# Altium PCB PCB.pcbdoc
Units mil, origin at the board's own origin, x right, y up, seen from the top; angles counter-clockwise.
Board outline 4358.27 x 3713.31 mil, 2 copper layers (Top Layer, Bottom Layer); 36 components, 36 nets, 179 pads, 88 vias.
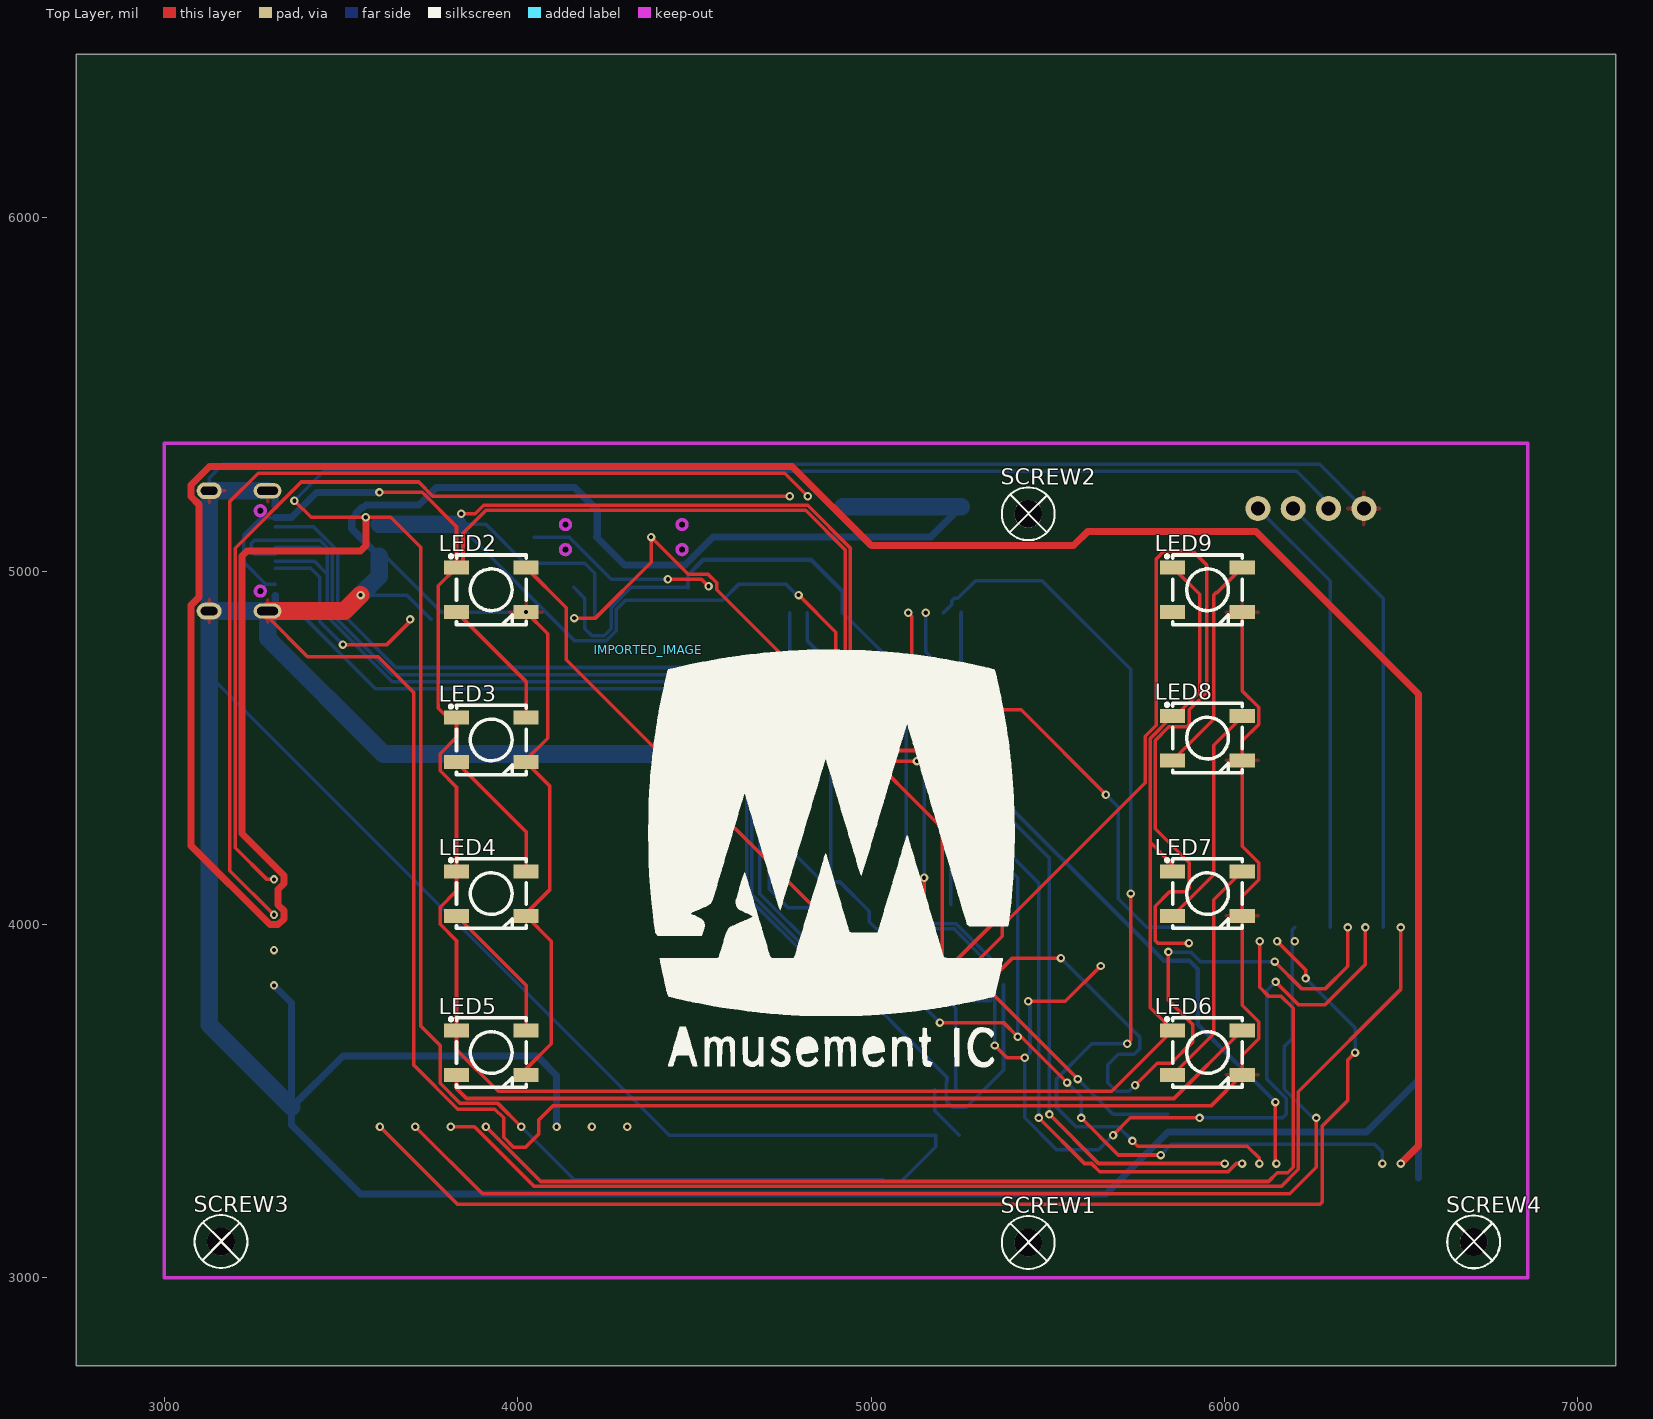
[diagram p0: Top Layer view]
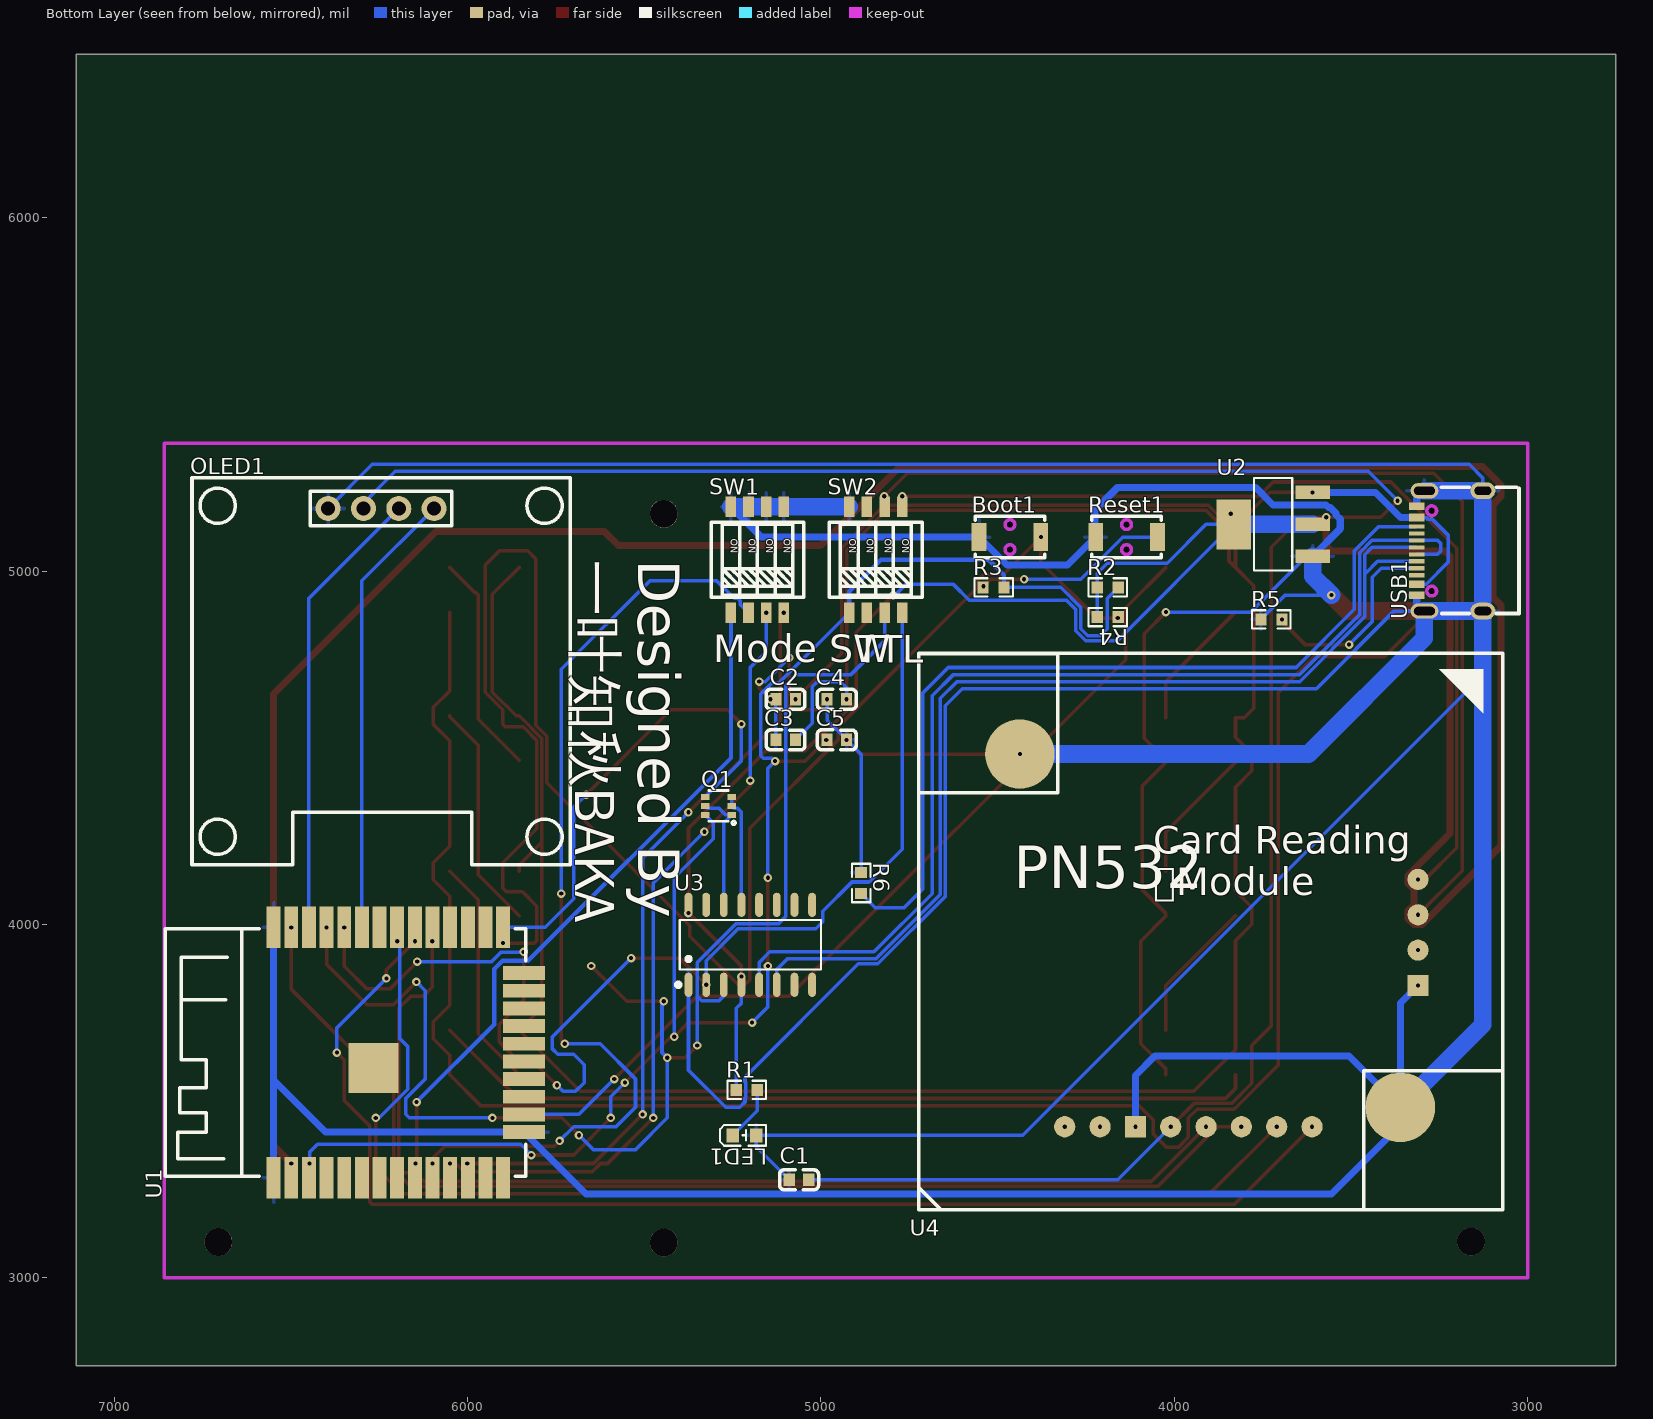
[diagram p1: Bottom Layer view, seen from below]

## Layer stack, top to bottom
Top Layer: signal copper (thickness not stored)
Dielectric: dielectric 12.6, FR-4, Dk 4.8
Bottom Layer: signal copper (thickness not stored)

## Board outline
7108.27,2750 2750,2750 2750,6463.31 7108.27,6463.31

## Design rules (kind name [scope] priority, off if disabled: settings)
Clearance copperThickness1oz [All] p1: gap=7 ignorepadtopadclearanceinfootprint=FALSE except(4: Track-Track; 6: Track-SMDPad SMDPad-SMDPad Track-THPad SMDPad-THPad THPad-THPad Track-Via SMDPad-Via THPad-Via Via-Via SMDPad-Fill THPad-Fill Via-Fill Fill-Fill Track-Region SMDPad-Region THPad-Region Via-Region Region-Region Track-Poly SMDPad-Poly THPad-Poly Via-Poly Fill-Poly Region-Poly Poly-Poly Track-Text SMDPad-Text THPad-Text Via-Text Fill-Text Region-Text Poly-Text Text-Text; 6.9: Track-Hole SMDPad-Hole THPad-Hole Via-Hole Fill-Hole Region-Hole Poly-Hole Text-Hole Sheet-Hole; 11.8: Track-Fill Fill-Region Track-Sheet SMDPad-Sheet THPad-Sheet Via-Sheet Fill-Sheet Region-Sheet Poly-Sheet Text-Sheet)
Clearance copperThickness2oz [All] p1: gap=7 ignorepadtopadclearanceinfootprint=FALSE except(6: Track-SMDPad SMDPad-SMDPad Track-THPad SMDPad-THPad THPad-THPad Track-Via SMDPad-Via THPad-Via Via-Via SMDPad-Fill THPad-Fill Via-Fill Fill-Fill Track-Region SMDPad-Region THPad-Region Via-Region Region-Region Track-Poly SMDPad-Poly THPad-Poly Via-Poly Fill-Poly Region-Poly Poly-Poly Track-Text SMDPad-Text THPad-Text Via-Text Fill-Text Region-Text Poly-Text Text-Text; 6.9: Track-Hole SMDPad-Hole THPad-Hole Via-Hole Fill-Hole Region-Hole Poly-Hole Text-Hole Sheet-Hole; 8: Track-Track; 11.8: Track-Fill Fill-Region Track-Sheet SMDPad-Sheet THPad-Sheet Via-Sheet Fill-Sheet Region-Sheet Poly-Sheet Text-Sheet)
DiffPairsRouting differentialPair [All] p1: maxuncoupledlength=10 maxlimit=6 mostfreqgap=6 toplayer_minwidth=5 toplayer_prefwidth=10 toplayer_maxwidth=100 bottomlayer_minwidth=5 bottomlayer_prefwidth=10 bottomlayer_maxwidth=100
PasteMaskExpansion pasteMaskExpansion [All] p1:
PlaneConnect innerPlane [All] p1: planeconnectstyle=Relief reliefexpansion=20 reliefentries=4 reliefconductorwidth=10 reliefairgap=10
PolygonConnect copperRegion [All] p1: connectstyle=Relief reliefentries=4 reliefconductorwidth=10 polygonreliefangle="90 Angle" airgapwidth=10
RoutingVias viaSize [All] p1: viastyle="Through Hole" holewidth=12.0078 minholewidth=11.811 maxholewidth=248.0314 width=24.0158 minwidth=19.685 maxwidth=393.7008
SolderMaskExpansion solderMaskExpansion [All] p1: useseparateexpansions=TRUE expansion=2 expansionbottom=2
Width copperThickness1oz [All] p1: maxlimit=100 minlimit=5 preferedwidth=10
Width copperThickness2oz [All] p1: maxlimit=100 minlimit=8 preferedwidth=10

## Components (designator, comment, footprint, x,y, rotation, side; value= is the part's Value field where it differs from the comment)
Boot1 "ZX-QC34-2TPDZ" KEY-SMD_L3.9-W3.0-LS5.0-EH 4465,5096.26 r180 bottom
C1 "CL10A106MA8NRNC" C0603 5062.23,3277.2 r0 bottom
C2 "CGA0603X7R104K500JT" C0603 5100,4637.2 r180 bottom
C3 "CL10A106MA8NRNC" C0603 5100,4522.2 r180 bottom
C4 "CGA0603X7R104K500JT" C0603 4955,4637.2 r180 bottom
C5 "CL10A105KB8NNNC" C0603 4955,4522.2 r180 bottom
IMPORTED_IMAGE "IMPORTED_IMAGE" IMPORTED_IMAGE 4370,4777.2 r0 top
LED1 "YLED0603R" LED0603-FD 5216.7,3402.89 r0 bottom
LED2 "WS2812B-V5/W" LED-SMD_4P-L5.0-W5.0-TL-1 3925,4947.2 r0 top
LED3 "WS2812B-V5/W" LED-SMD_4P-L5.0-W5.0-TL-1 3925,4522.2 r0 top
LED4 "WS2812B-V5/W" LED-SMD_4P-L5.0-W5.0-TL-1 3925,4087.2 r0 top
LED5 "WS2812B-V5/W" LED-SMD_4P-L5.0-W5.0-TL-1 3925,3637.2 r0 top
LED6 "WS2812B-V5/W" LED-SMD_4P-L5.0-W5.0-TL-1 5952.34,3637.2 r0 top
LED7 "WS2812B-V5/W" LED-SMD_4P-L5.0-W5.0-TL-1 5952.34,4087.2 r0 top
LED8 "WS2812B-V5/W" LED-SMD_4P-L5.0-W5.0-TL-1 5952.34,4527.2 r0 top
LED9 "WS2812B-V5/W" LED-SMD_4P-L5.0-W5.0-TL-1 5952.34,4947.2 r0 top
OLED1 "HS96L03W2C03" OLED-TH_L27.8-W27.2-P2.54_C9900033791 6245,5177.2 r180 bottom
Q1 "UMH3N" SC-70-6_L2.2-W1.3-P0.65-LS2.1-BR 5290,4335.35 r180 bottom
R1 "RT0603BRC07500RL" R0603 5210.25,3531.36 r180 bottom
R2 "FRC0603J103TS" R0603 4188.15,4953.9 r180 bottom
R3 "0603WAF2000T5E" R0603 4511.38,4953.9 r180 bottom
R4 "FRC0603J103TS" R0603 4188.15,4869.92 r0 bottom
R5 "0603WAF5101T5E" R0603 3725,4863.21 r180 bottom
R6 "0603WAF5101T5E" R0603 4886.3,4117.2 r270 bottom
Reset1 "ZX-QC34-2TPDZ" KEY-SMD_L3.9-W3.0-LS5.0-EH 4135,5096.26 r180 bottom
SCREW1 "M2螺丝" M2螺丝 5445,3099.41 r0 top
SCREW2 "M2螺丝" M2螺丝 5445,5162.2 r0 top
SCREW3 "M2螺丝" M2螺丝 3160,3102.2 r0 top
SCREW4 "M2螺丝" M2螺丝 6705.85,3101.33 r0 top
SW1 "DSHP04TS-S" SW-SMD_8P-L6.7-W5.4-P1.27-LS8.5 5180,5032.2 r180 bottom
SW2 "DSHP04TS-S" SW-SMD_8P-L6.7-W5.4-P1.27-LS8.5 4845,5032.2 r180 bottom
U1 "ESP32-S" WIRELM-SMD_ESP32-S 6195,3637.2 r90 bottom
U2 "AMS1117-3.3_C347222" SOT-223-4_L6.5-W3.5-P2.30-LS7.0-BR 3720,5132.2 r180 bottom
U3 "CH340C" SOP-16_L10.0-W3.9-P1.27-LS6.0-BL 5200,3942.2 r180 bottom
U4 "PN532_Board" PN532_Board 3880,4012.2 r180 bottom
USB1 "TYPE-C 16PIN 2MD(073)" USB-C-SMD_TYPE-C-6PIN-2MD-073 3220,5057.2 r90 bottom

## Footprints (in the part's own frame and the unit in brackets; to place one, negate y for a bottom-side part, rotate by r counter-clockwise, add the part's x,y. Pads: shape width x height; smd on the part's side, far side on the other; paste and mask are expansions set on the pad)
C0603 [mm]
  rect 0.8x0.9 smd: 1(-0.7,0) 2(0.7,0)
  silkscreen extent -1.41,-0.71 1.39,0.72
IMPORTED_IMAGE [mil]
  silkscreen extent 0,-1182 1036,0
KEY-SMD_L3.9-W3.0-LS5.0-EH [mm]
  rect 1.05x2 smd: 1(-2.225,0) 2(2.225,0)
  Multi-Layer board cut-out: -0.35,0.9 -0.315,1.052 -0.218,1.174 -0.078,1.241 0.078,1.241 0.218,1.174 0.315,1.052 0.35,0.9 0.35,0.9 0.303,0.725 0.175,0.597 0,0.55 -0.175,0.597 -0.303,0.725 -0.35,0.9
  Multi-Layer board cut-out: -0.35,-0.9 -0.315,-0.748 -0.218,-0.626 -0.078,-0.559 0.078,-0.559 0.218,-0.626 0.315,-0.748 0.35,-0.9 0.35,-0.9 0.303,-1.075 0.175,-1.203 0,-1.25 -0.175,-1.203 -0.303,-1.075 -0.35,-0.9
  Multi-Layer keep-out circle w0.254: c0,0.9 r0.35
  Multi-Layer keep-out circle w0.254: c0,-0.9 r0.35
  silkscreen extent -2.5,-1.5 2.5,1.5
LED0603-FD [mm]
  rect 0.9x1 smd: 1(-0.85,0) 2(0.85,0)
  silkscreen extent -1.55,-0.75 1.75,0.75
LED-SMD_4P-L5.0-W5.0-TL-1 [mm]
  rect 1.8x1 smd: 1(-2.5,1.6) 2(-2.5,-1.6) 3(2.5,-1.6) 4(2.5,1.6)
  silkscreen extent -3,-2.5 2.51,2.5
M2螺丝 [mm]
  round 2 hole 2: 1(0,0)
  silkscreen extent -1.9,-1.9 1.9,1.9
OLED-TH_L27.8-W27.2-P2.54_C9900033791 [mm]
  round 1.8 hole 1: 1(-3.81,0) 2(-1.27,0) 3(1.27,0) 4(3.81,0)
  silkscreen extent -13.6,-25.6 13.6,2.2
PN532_Board [mil]
  round 60 smd: 1(-430,-585) 2(-330,-585) 4(-130,-585) 5(-30,-585) 6(70,-585) 7(170,-585) 8(270,-585) 10(570,-85) 11(570,15) 12(570,115)
  rect 60x60 smd: 3(-230,-585) 9(570,-185)
  round 196.85 smd: 13(520,-530) 14(-556.86,470)
  silkscreen extent -844,-820 810,755
R0603 [mil]
  rect 31.75x34.02 smd: 1(-29.66,0) 2(29.66,0)
  silkscreen extent -55,-26 55,26
SC-70-6_L2.2-W1.3-P0.65-LS2.1-BR [mm]
  rect 0.6x0.42 smd: 1(0.95,-0.65) 2(0.95,0) 3(0.95,0.65) 4(-0.95,0.65) 5(-0.95,0) 6(-0.95,-0.65)
  silkscreen extent -0.7,-1.34 1.22,1.1
SOP-16_L10.0-W3.9-P1.27-LS6.0-BL [mm]
  oval 0.56x1.745 smd: 1(-4.445,-2.872) 2(-3.175,-2.872) 3(-1.905,-2.872) 4(-0.635,-2.872) 5(0.635,-2.872) 6(1.905,-2.872) 7(3.175,-2.872) 8(4.445,-2.872) 9(4.445,2.872) 10(3.175,2.872) 11(1.905,2.872) 12(0.635,2.872) 13(-0.635,2.872) 14(-1.905,2.872) 15(-3.175,2.872) 16(-4.445,2.872)
  silkscreen extent -5.33,-3.02 5.08,1.77
SOT-223-4_L6.5-W3.5-P2.30-LS7.0-BR [mm]
  rect 2.47x0.98 smd: 1(2.835,-2.3) 2(2.835,0) 3(2.835,2.3)
  rect 2.47x3.6 smd: 4(-2.835,0)
  silkscreen extent -1.37,-3.33 1.37,3.33
SW-SMD_8P-L6.7-W5.4-P1.27-LS8.5 [mil]
  rect 30x59.05 smd: 1(-75,-150) 2(-25,-150) 3(25,-150) 4(75,-150) 5(75,150) 6(25,150) 7(-25,150) 8(-75,150)
  silkscreen extent -131,-106 131,106
USB-C-SMD_TYPE-C-6PIN-2MD-073 [mm]
  rect 0.55x1.1 smd: 1(-3.2,2.375) 2(-2.4,2.375) 11(2.4,2.375) 12(3.2,2.375)
  rect 0.3x1.1 smd: 3(-1.75,2.375) 4(-1.25,2.375) 5(-0.75,2.375) 6(-0.25,2.375) 7(0.25,2.375) 8(0.75,2.375) 9(1.25,2.375) 10(1.75,2.375)
  oval 1.2x1.8 hole 0.6 slot 1.2 at 90 deg: 13(-4.325,-2.375) 14(4.325,-2.375)
  oval 1.1x2 hole 0.6 slot 1.5 at 90 deg: 13(-4.325,1.825) 14(4.325,1.825)
  Multi-Layer board cut-out: -2.89,1.655 -2.718,1.606 -2.592,1.478 -2.547,1.305 -2.592,1.132 -2.718,1.004 -2.89,0.955 -2.89,0.955 -3.062,1.004 -3.187,1.132 -3.233,1.305 -3.187,1.478 -3.062,1.606 -2.89,1.655
  Multi-Layer board cut-out: 2.89,1.655 3.062,1.606 3.188,1.478 3.233,1.305 3.188,1.132 3.062,1.004 2.89,0.955 2.89,0.955 2.718,1.004 2.593,1.132 2.547,1.305 2.593,1.478 2.718,1.606 2.89,1.655
  Multi-Layer keep-out circle w0.254: c-2.89,1.305 r0.35
  Multi-Layer keep-out circle w0.254: c2.89,1.305 r0.35
  silkscreen extent -4.5,-4.97 4.57,0.6
WIRELM-SMD_ESP32-S [mm]
  rect 3x1 smd: 1(-9,9.005) 2(-9,7.735) 3(-9,6.465) 4(-9,5.195) 5(-9,3.925) 6(-9,2.655) 7(-9,1.385) 8(-9,0.115) 9(-9,-1.155) 10(-9,-2.425) 11(-9,-3.695) 12(-9,-4.965) 13(-9,-6.235) 14(-9,-7.505) 25(9,-7.505) 26(9,-6.235) 27(9,-4.965) 28(9,-3.695) 29(9,-2.425) 30(9,-1.155) 31(9,0.115) 32(9,1.385) 33(9,2.655) 34(9,3.925) 35(9,5.195) 36(9,6.465) 37(9,7.735) 38(9,9.005)
  rect 1x3 smd: 15(-5.715,-9.005) 16(-4.445,-9.005) 17(-3.175,-9.005) 18(-1.905,-9.005) 19(-0.635,-9.005) 20(0.635,-9.005) 21(1.905,-9.005) 22(3.175,-9.005) 23(4.445,-9.005) 24(5.715,-9.005)
  rect 3.6x3.6 smd: 39(-1.105,1.815)
  silkscreen extent -8.89,-9.13 8.89,16.78

## Via types
v1: diameter 24.02, hole 12.01, Top Layer to Bottom Layer, 88 vias

## Nets (pads, with @x,y where several pads share a name; then routed paths per layer and width w, separated by ;. In a path a pad name is that pad's centre, name@x,y a point inside that pad or via, vN(x,y) a via of type N, cw(c..) or ccw(c..) an arc to the next point about the centre after c; other vN are vias at no path point)
3V3: C1.1 C2.2 OLED1.2 R1.1 R2.1 R4.2 U1.2 U2.2 U2.4 U3.4 U3.16 U4.4 | length 19840.8
  Top Layer w10: v1(3367.71,5199.5) 3415,5152.2 v1(3570,5152.2) 3640,5152.2 3725,5067.2 3725,3712.2 3780.16,3657.05 3780.16,3549.98 3836.95,3493.19 3944.02,3493.19 v1(4010,3427.2) ; v1(3840,5162.2) 3880.18,5162.2 3904.19,5186.22 4820.81,5186.22 4941.46,5065.57 4941.46,4768.19 v1(5072.44,4637.2) ; v1(4795,4932.2) 4900,4827.2 4900,4637.2 4904.45,4632.76 4904.45,4627.68 4986.93,4545.2 4994.52,4545.2 5007.99,4531.73 5007.99,4529.21 5045,4492.2 5155,4492.2 5375,4272.2 v1(5375,4032.2) 5225,3882.2 v1(5225,3852.2)
  Top Layer w20: v1(3570,5152.2) 3570,5072.2 3554.51,5056.72 3233.16,5056.72 3219.02,5042.57 3219.02,4257.78 3337.99,4138.8 3337.99,4115.61 3321.59,4099.21 3321.59,4055.2 3337.99,4038.8 3337.99,4015.61 3321.59,3999.21 3298.41,3999.21 3075.08,4222.54 3075.08,4903.34 3098.28,4926.54 3098.28,5187.87 3075.08,5211.07 3075.08,5243.89 3127.41,5296.22 4776.69,5296.22 5000.74,5072.16 5573.31,5072.16 5613.35,5112.2 6090,5112.2 6550,4652.2 6550,3373.6 v1(6499.53,3323.13)
  Bottom Layer w10: v1(3367.71,5199.5) 3450.41,5282.2 6205,5282.2 6295,5192.2 OLED1.2 ; v1(4010,3427.2) 4160,3277.2 C1.1 ; R4.2 R2.1 4217.81,4994.4 4190,5022.2 4020,5022.2 3910,5132.2 U2.4 4160.63,4803.19 4250.81,4803.19 4279.02,4831.4 4279.02,4891.4 4304.82,4917.2 4580,4917.2 4625,4962.2 4760,4962.2 v1@4792.5,4929.7 ; v1(5225,3852.2) 5225,3777.2 5239.91,3762.29 R1.1
  Bottom Layer w50: U2.2 U2.4
5V: C3.2 C4.2 LED2.1 LED3.1 LED4.1 LED5.1 LED6.1 LED7.1 LED8.1 LED9.1 U2.3 USB1.2 USB1.11 | length 8181.5
  Top Layer w10: v1(3608.39,5222.75) 3729.45,5222.75 3826.57,5125.63 LED2.1 ; v1(4927.44,4637.2) 4927.44,5059.76 4815,5172.2 3910,5172.2 3845,5107.2 3845,5028.62 LED2.1 ; LED7.1 5853.91,4168.29 5790,4232.2 ; LED9.1 5930,4934.11 5930,4657.2 5862.99,4590.19 LED8.1 5790,4526.28 5790,4232.2 ; LED2.1 3775,4958.62 3775,4612.2 3802.01,4585.19 LED3.1 3826.57,4529.87 3780.16,4483.45 3780.16,4434.98 3826.57,4388.56 LED4.1 3826.57,4094.87 3780.16,4048.45 3780.16,3999.98 3826.57,3953.56 LED5.1 3826.57,3645.63 3945,3527.2 5680.92,3527.2 LED6.1 5790,3764.11 5790,4232.2
  Bottom Layer w10: USB1.2 3287.11,4962.72 3225,5024.83 3225,5102.2 3269.02,5146.23 3281.63,5146.23 3287.11,5151.7 USB1.11 ; v1(4927.44,4637.2) 4927.44,4669.64 4945,4687.2 5010,4687.2 5025,4672.2 5025,4569.64 C3.2
  Bottom Layer w20: USB1.11 3359.49,5151.7 3430,5222.2 3607.84,5222.2 v1(3608.39,5222.75)
$1N2545: LED1.2 R1.2 | length 157.3
  Bottom Layer w10: R1.2 5180.59,3472.46 LED1.2
$1N2903: R3.1 Reset1.2 | length 550.2
  Top Layer w10: v1(4425,4977.2) 4520,4977.2 v1(4540,4957.2)
  Bottom Layer w10: Reset1.2 4145.94,5096.26 4265,4977.2 v1(4425,4977.2)
$1N5250: R5.2 USB1.4 | length 571
  Top Layer w10: v1(3505,4792.2) 3630,4792.2 v1@3695,4857.2
  Bottom Layer w10: USB1.4 3414.2,5008 3440,4982.2 3440,4857.2 v1(3505,4792.2)
  other v1: 3695.34,4863.21
$1N5276: R6.2 USB1.10 | length 2458.1
  Bottom Layer w10: USB1.10 3420.92,5126.11 3490,5057.03 3490,4892.2 3655,4727.2 4640,4727.2 4712.5,4654.7 4712.5,4099.7 4765,4047.2 4845.96,4047.2 R6.2
D+: U3.5 USB1.6 USB1.8 | length 3015
  Bottom Layer w10: USB1.6 3254.84,5047.36 3245,5057.2 3245,5077.2 3254.53,5086.73 USB1.8 3440.47,5086.73 3475,5052.2 3475,4877.2 3645,4707.2 4625,4707.2 4685,4647.2 4685,4087.2 4850,3922.2 5145,3922.2 5175,3892.2 U3.5
D-: U3.6 USB1.5 USB1.7 | length 2937.7
  Bottom Layer w10: USB1.5 3424.53,5027.68 3456.43,4995.78 3460.98,4995.78 ; USB1.7 3440.16,5067.05 3460.98,5046.22 3460.98,4995.78 ; U3.6 5125,3872.2 5095,3902.2 4845,3902.2 4662.5,4084.7 4662.5,4639.7 4615,4687.2 3645.18,4687.2 3460.98,4871.4 3460.98,4995.78
DTR: Q1.2 Q1.3 U3.13 | length 322.9
  Bottom Layer w10: U3.13 5225,4317.77 5236.24,4329.01 5246.26,4329.01 Q1.2 Q1.3
GND: 
IO0: Boot1.2 Q1.4 R4.1 U1.25 | length 6331.7
  Top Layer w10: v1(4160,4867.2) 4220,4867.2 4377.4,5024.6 v1(4377.4,5096.26) 4482.44,4991.22 4538.5,4991.22 4562.99,4966.73 4562.99,4947.68 4950.43,4560.24 4950.43,4523.23 5202.01,4271.65 5202.01,3842.68 5215.48,3829.21 5234.52,3829.21 5371.83,3966.52 5371.83,3996.52 5775.98,4400.67 5775.98,4532.09 5807.49,4563.6 5807.49,5034.43 5830.27,5057.2 5910,5057.2 5950,5017.2 5950,4657.38 5900.33,4607.71 5900.33,4565.96 5893.89,4559.53 5843.06,4559.53 5804.02,4520.48 5804.02,4270.74 5900.33,4174.43 5900.33,4102.53 5890,4092.2 5845,4092.2 5804.02,4051.22 5804.02,3954.28 5811.09,3947.2 v1(5900,3947.2) ; v1(5225,4567.2) 5265,4607.2 5425,4607.2 v1(5665,4367.2)
  Bottom Layer w10: v1@5225,4562.2 5225,4463.34 Q1.4 ; v1(5665,4367.2) 5700,4332.2 5700,4072.2 5780.67,3991.53 U1.25
L0: LED2.4 U1.16 | length 2544.4
  Top Layer w10: LED2.4 4137.01,4896.61 4137.01,4749.54 5089.34,3797.2 5350,3797.2 v1(5585,3562.2)
  Bottom Layer w10: v1(5585,3562.2) 5685,3462.2 U1.16
L1: LED2.2 LED3.4 | length 380.6
  Top Layer w10: LED2.2 4023.43,4687.36 LED3.4
L2: LED3.2 LED4.4 | length 390.6
  Top Layer w10: LED3.2 4023.43,4262.36 LED4.4
L3: LED4.2 LED5.4 | length 405.6
  Top Layer w10: LED4.2 4023.43,3827.36 LED5.4
L4: LED5.2 LED6.4 | length 2354.5
  Top Layer w10: LED5.2 3826.57,3535.63 3855,3507.2 5857.77,3507.2 LED6.4
L5: LED6.2 LED7.4 | length 657.5
  Top Layer w10: LED6.2 5970,3690.3 5970,4069.43 LED7.4
L6: LED7.2 LED8.4 | length 647.5
  Top Layer w10: LED7.2 5970,4140.3 5970,4507.2 6050.76,4587.97 LED8.4
L7: LED8.2 LED9.4 | length 629.1
  Top Layer w10: LED8.2 5970,4580.3 5970,4932.2 5977.07,4939.28 5979.84,4939.28 LED9.4
L8: LED9.2
MISO: U1.31 U4.7 | length 3394.1
  Top Layer w10: v1(3710,3427.2) 3900,3237.2 6185,3237.2 6260,3312.2 v1(6260,3452.2)
  Bottom Layer w10: U1.31 6192.93,3984.93 6192.93,3677.44 6170,3654.51 6170,3532.9 6250.69,3452.2 v1(6260,3452.2)
  other v1: 6199.66,3952.2
MOSI: U1.37 U4.6 | length 3290.3
  Top Layer w10: v1(3810,3427.2) 3877.48,3427.2 4046.5,3258.19 6160.81,3258.19 6209.02,3306.4 6209.02,3526.22 6500,3817.2 v1@6500,3987.2
  other v1: 6499.53,3991.53
RES: C5.1 Q1.6 R2.2 R3.2 SW2.1 U1.3 | length 4792
  Top Layer w10: v1(4985,4522.2) 5045,4462.2 v1(5130,4462.2) ; v1(5150,3882.2) v1(5150,4132.2) ; v1(5195,3722.2) 5375,3722.2 v1(5415,3682.2) 5425,3682.2 v1(5555,3552.2) ; v1(5595,3452.2) 5700,3347.2 v1(5820,3347.2)
  Bottom Layer w10: R2.2 4190,4922.39 4190,4837.2 4210,4817.2 4245,4817.2 4265,4837.2 4265,4897.2 4321.7,4953.9 R3.2 ; SW2.1 5120,4682.2 5140,4682.2 5170,4652.2 5170,4477.2 5162.93,4470.13 5137.93,4470.13 v1(5130,4462.2) 5150,4442.2 v1(5150,4132.2) ; v1(5150,3882.2) 5150,3767.2 v1(5195,3722.2) ; Q1.6 5305,4287.36 5305,4242.2 5415,4132.2 v1(5415,3682.2) ; v1(5555,3552.2) 5595,3512.2 v1(5595,3452.2) ; v1(5820,3347.2) 5850,3377.2 6425,3377.2 6447.64,3354.57 v1(6447.64,3323.13)
  Bottom Layer w12: R3.2 4481.72,4988.93 4525,5032.2 4830,5032.2 4920,4942.2 SW2.1
RTS: Q1.1 Q1.5 U3.14 | length 349.1
  Bottom Layer w10: U3.14 5275,4287.36 Q1.1 5269.38,4309.76 5288.63,4329.01 5321.06,4329.01 Q1.5
RX_B: SW2.5 U4.12 | length 2658.9
  Top Layer w10: v1(3310,4127.2) 3290,4127.2 3200,4217.2 3200,5064.59 3387.61,5252.2 3719.82,5252.2 3759.82,5212.2 v1(4770,5212.2)
RXD: SW2.4 U1.34 U3.2 | length 3472.6
  Top Layer w10: v1(5325,3829.11) 5400.59,3904.7 v1(5537.5,3904.7) ; v1(5747.5,3544.7) 5810,3607.2 5850,3607.2 5910,3667.2 5910,3717.2 5841.82,3785.38 v1(5841.82,3922.2) ; v1(6142.5,3894.7) 6220,3817.2 6285,3817.2 6349.53,3881.73 v1(6349.53,3991.53)
  Bottom Layer w10: SW2.4 4770,4212.2 4860,4122.2 4862.54,4122.2 4864.74,4120 4912.2,4120 4995,4037.2 4995,4007.2 5015,3987.2 5235,3987.2 5325,3897.2 v1(5325,3829.11) ; v1(5537.5,3904.7) 5760,3682.2 5760,3647.2 5745,3632.2 5700,3632.2 5670,3602.2 5670,3552.2 5695,3527.2 5730,3527.2 v1(5747.5,3544.7) ; v1(5841.82,3922.2) 5842.53,3921.5 5905.71,3921.5 5932.5,3894.7 v1(6142.5,3894.7)
SCK: U1.30 U4.8 | length 3629
  Top Layer w10: v1(3610,3427.2) 3830,3207.2 6270,3207.2 6277.07,3214.28 6277.07,3429.28 6350,3502.2 6350,3617.2 v1(6370,3637.2) ; v1(6149.33,3952.2) 6230,3871.54 v1(6230,3847.2)
  Bottom Layer w10: v1(6230,3847.2) 6370,3707.2 v1(6370,3637.2)
SDA: OLED1.4 U1.33 | length 1270.4
  Bottom Layer w10: OLED1.4 6299.53,4972.67 U1.33
SDL: OLED1.3 U1.36 | length 1291.1
  Bottom Layer w10: OLED1.3 6449.53,4922.67 U1.36
SS: U1.29 U4.5 | length 3065.6
  Top Layer w10: v1(3910,3427.2) 4065,3272.2 6125,3272.2 6150,3297.2 6180,3297.2 6195,3312.2 6195,3762.2 6160,3797.2 6125,3797.2 6100,3822.2 v1(6100,3952.2)
SW1: SW1.4 U1.12 | length 2139.4
  Top Layer w10: v1(5105,4882.2) 5115,4872.2 5115,4577.2 v1(5375,4317.2) ; v1(5505,3462.2) 5644.07,3323.13 v1(6001.07,3323.13)
  Bottom Layer w10: v1(5375,4317.2) 5505,4187.2 v1(5505,3462.2)
SW2: SW1.3 U1.11 | length 2210.3
  Top Layer w10: v1(5200,4407.2) 5200,4392.2 v1(5330,4262.2) ; v1(5475,3452.2) 5604.07,3323.13 5624.25,3323.13 5647.24,3300.14 6010.6,3300.14 6033.59,3323.13 v1(6050.24,3323.13)
  Bottom Layer w10: v1(5155,4882.2) 5155,4772.2 5200,4727.2 v1(5200,4407.2) ; v1(5330,4262.2) 5475,4117.2 v1(5475,3452.2)
SW3: SW1.2 U1.10 | length 2716.2
  Top Layer w10: v1(5725,3662.2) 5735,3672.2 v1(5735,4087.21) ; v1(5740,3387.2) 5755,3372.2 6065,3372.2 6099.4,3337.81 v1(6099.4,3323.13)
  Bottom Layer w10: SW1.2 5229.02,4906.22 5229.02,4916.28 5235.45,4922.72 5245.51,4922.72 5295,4972.2 5485,4972.2 5735,4722.2 v1@5735,4082.2 ; v1(5725,3662.2) 5625,3662.2 5525,3562.2 5525,3482.2 5580,3427.2 5700,3427.2 v1(5740,3387.2)
SW4: SW1.1 U1.9 | length 1971
  Top Layer w10: v1(6144.53,3497.2) 6144.53,3325.99 v1(6147.39,3323.13)
  Bottom Layer w12: SW1.1 5255,4471.13 5828.93,3897.2 5901.16,3897.2 5925,3873.36 5925,3716.73 v1(6144.53,3497.2)
TX_B: SW2.6 U4.11 | length 2918
  Top Layer w10: v1(3310,4027.2) 3185,4152.2 3185,5197.2 3265,5277.2 4756.11,5277.2 v1(4821.11,5212.2)
TXD: SW2.3 U1.35 U3.3 | length 4068.1
  Top Layer w10: v1(5350,3657.2) 5385,3622.2 v1(5435,3622.2) ; v1(5445,3782.2) 5550,3782.2 v1(5650,3882.2) ; v1(5685,3403.18) 5734.03,3452.2 v1(5930,3452.2) ; v1(6145,3837.2) 6210,3772.2 6285,3772.2 6399.53,3886.73 v1(6399.53,3991.53)
  Bottom Layer w10: SW2.3 4820,4802.2 4915,4707.2 5070,4707.2 5100,4677.2 5100,4022.2 5120.98,4001.22 5240.81,4001.22 5350,3892.03 5350,3796.77 ; U3.3 5275,3797.2 5288.42,3783.78 5337.01,3783.78 5350,3796.77 ; v1(5350,3657.2) 5350,3796.77 ; v1(5445,3782.2) 5450,3777.2 5450,3637.2 v1(5435,3622.2) 5435,3452.2 5525,3362.2 5644.03,3362.2 v1(5685,3403.18) ; v1(5930,3452.2) 6165,3452.2 6175,3462.2 6175,3507.2 6120,3562.2 6120,3812.2 v1(6145,3837.2)
pads on no net: Boot1.1 C1.2 C2.1 C3.1 C4.1 C5.2 LED1.1 LED2.3 LED3.3 LED4.3 LED5.3 LED6.3 LED7.3 LED8.3 LED9.3 OLED1.1 R5.1 R6.1 Reset1.1 SCREW1.1 SCREW2.1 SCREW3.1 SCREW4.1 SW1.5 SW1.6 SW1.7 SW1.8 SW2.2 SW2.7 SW2.8 U1.1 U1.4 U1.5 U1.6 U1.7 U1.8 U1.13 U1.14 U1.15 U1.17 U1.18 U1.19 U1.20 U1.21 U1.22 U1.23 U1.24 U1.26 U1.27 U1.28 U1.32 U1.38 U1.39 U2.1 U3.1 U3.7 U3.8 U3.9 U3.10 U3.11 U3.12 U3.15 U4.1 U4.2 U4.3 U4.9 U4.10 U4.13 U4.14 USB1.1 USB1.3 USB1.9 USB1.12 USB1.13 USB1.14
copper on no net: | length 30799
  Top Layer w10: 3291.86,4886.93 3291.86,4870.35 3405,4757.2 3605,4757.2 3705,4657.2 3705,3602.2 3830,3477.2 3935,3477.2 3960,3452.2 3960,3397.2 3987.5,3369.7 4022.5,3369.7 4060,3407.2 4060,3447.2 4100,3487.2 5963.75,3487.2 6050.76,3574.21 6050.76,3629.54 6097.18,3675.96 6097.18,3724.43 6050.76,3770.85 6050.76,4024.21 6050.76,4079.54 6097.18,4125.96 6097.18,4174.43 6050.76,4220.85 6050.76,4464.21 6050.76,4519.54 6097.18,4565.96 6097.18,4614.43 6050.76,4660.85 6050.76,4884.21 ; 4023.43,3574.21 4023.43,3590.63 4095,3662.2 4095,3952.64 4023.43,4024.21 4023.43,4030.63 4090,4097.2 4090,4392.64 4023.43,4459.21 4023.43,4465.63 4085,4527.2 4085,4822.64 v1(4023.43,4884.21) ; v1(4436.86,4482.2) 4890,4482.2 v1@4925,4517.2 ; v1(4982.56,4637.2) 5012.56,4607.2 5080,4607.2 5095.43,4622.64 5095.43,4646.73 5090,4652.16 v1(5090,4755.15) ; v1(5143.14,4637.43) 5175,4669.29 v1(5175,4687.2)
  Top Layer w50: 3291.86,4886.93 3509.72,4886.93 v1(3555,4932.2)
  Bottom Layer w10: 3126.49,4705.71 4429.31,3402.89 5183.23,3402.89 5183.23,3370.65 5089.79,3277.2 ; 3126.49,5227.48 3126.49,5263.7 3165,5302.2 6270,5302.2 6395,5177.2 ; 3291.86,4886.93 3377.76,4886.93 3597.48,4667.2 4600,4667.2 4648.48,4618.72 4648.48,4078.9 4839.19,3888.19 4894.02,3888.19 5215,3567.2 5215,3554.87 5213.05,3552.92 5213.05,3509.81 5215,3507.86 5215,3497.2 5230,3482.2 5270,3482.2 5375,3587.2 5375,3829.11 ; v1(3555,4932.2) 3685.66,4932.2 3754.66,4863.21 ; 3608.39,5041.65 3625.55,5041.65 3782.99,4884.21 v1(4023.43,4884.21) ; 4886.3,4146.86 4886.3,4481.06 v1(4927.44,4522.2) 4982.56,4577.32 v1(4982.56,4637.2) ; v1(5090,4755.15) 5157.94,4687.2 v1(5175,4687.2) ; 5127.56,4522.2 5127.56,4637.2
  Bottom Layer w20: 3291.86,4886.93 3313.51,4908.58 3313.51,4931.22 ; 3291.86,5227.48 3313.51,5205.83 3313.51,5183.19 ; v1(3310,3827.2) 3360,3777.2 3360,3482.2 ; 3608.39,5041.65 3530,5120.04 3530,5147.2 3542.01,5159.21 3542.01,5163.8 3558.41,5180.2 3562.99,5180.2 3570,5187.2 3720,5187.2 3770,5237.2 4160,5237.2 4225,5172.2 4225,5098.66 4222.6,5096.26 4301.65,5017.2 4473.55,5017.2 4552.6,5096.26 5169.06,5096.26 5255,5182.2 ; v1(4110,3427.2) 4110,3572.2 4055,3627.2 3505,3627.2 3360,3482.2 ; 6549.53,3282.87 6549.53,3559.06 ; 6549.53,3991.53 6549.53,3559.06 ; 3360,3482.2 3360,3432.2 3555,3237.2 5665.47,3237.2 5840.47,3412.2 6402.68,3412.2 6549.53,3559.06
  Bottom Layer w50: 3291.86,5227.48 3126.49,5227.48 3126.49,4886.93 ; 3360,3482.2 3126.49,3715.71 3126.49,4705.71 3126.49,4886.93 ; v1(3555,4932.2) 3608.39,4985.59 3608.39,5041.65 ; v1(4436.86,4482.2) 3620,4482.2 3291.86,4810.35 3291.86,4886.93 3126.49,4886.93 ; 4920,5182.2 5105,5182.2 5155,5182.2 5205,5182.2 5255,5182.2
  other v1: 4210,3427.2 4310,3427.2 3310,3927.2

## Polygon pours and split planes (outlines as drawn)
no net on Top Layer (solid, remove dead copper): 3000,4765.91 4723.54,4765.91 4723.54,5362.2 3000,5362.2
no net on Bottom Layer (solid, remove dead copper, pour order 4): 3000,4765.91 4723.54,4765.91 4723.54,5362.2 3000,5362.2
no net on Top Layer (solid, remove dead copper, pour order 2): 4720.49,3000 6858.27,3000 6858.27,5362.2 4720.49,5362.2
no net on Bottom Layer (solid, remove dead copper, pour order 6): 4724.85,3000 6858.27,3000 6858.27,5362.2 4724.85,5362.2

## Keep-outs
Board Outline Layer:
  lines w10: 3000,3000 6858.27,3000 6858.27,5362.2 3000,5362.2 3000,3000

## Silkscreen, mask and mechanical layers (free items; w line width, h text height)
Bottom Silkscreen Layer:
  text "Designed By /  一叶知秋BAKA" at 5695,5032.2 h118.11 r90
  text "Mode SW" at 5305,4742.2 h78.74
  text "TTL" at 4900,4740.48 h78.74

## Text inside footprints (layer, text, board x,y; h text height)
SW1: Bottom Silkscreen Layer "ON" at 5255,5092.2 h20 r90; Bottom Silkscreen Layer "ON" at 5105,5092.2 h20 r90; Bottom Silkscreen Layer "ON" at 5155,5092.2 h20 r90; Bottom Silkscreen Layer "ON" at 5205,5092.2 h20 r90
SW2: Bottom Silkscreen Layer "ON" at 4920,5092.2 h20 r90; Bottom Silkscreen Layer "ON" at 4770,5092.2 h20 r90; Bottom Silkscreen Layer "ON" at 4820,5092.2 h20 r90; Bottom Silkscreen Layer "ON" at 4870,5092.2 h20 r90
U4: Bottom Silkscreen Layer "PN532" at 4455,4102.2 h120; Bottom Silkscreen Layer "Card Reading /  Module" at 4060,4082.2 h78.74